# Altium PCB version-01.pcbdoc
Units mm, origin at the board's own origin, x right, y up, seen from the top; angles counter-clockwise.
Board outline 112.01 x 82.68 mm, 2 copper layers (Top Layer, Bottom Layer); 60 components, 62 nets, 258 pads, 85 vias.
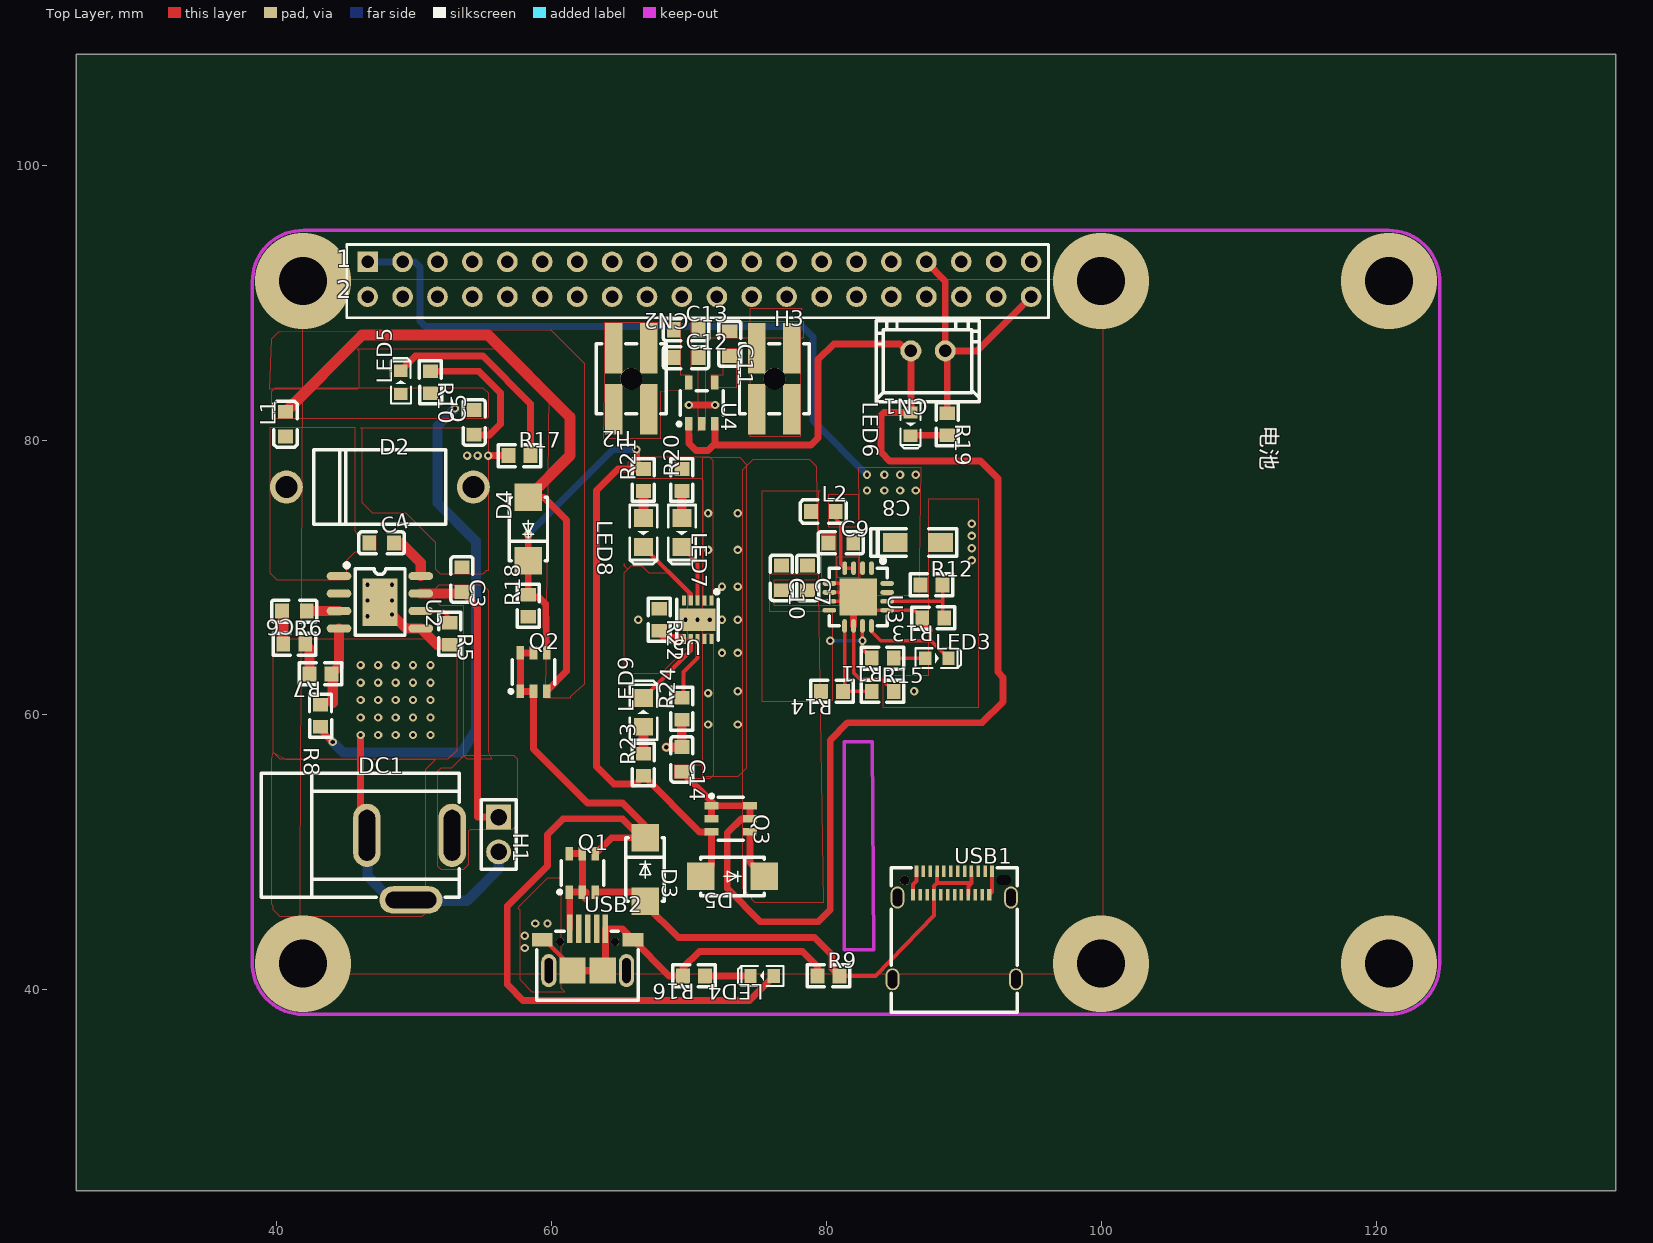
[diagram p0: Top Layer view]
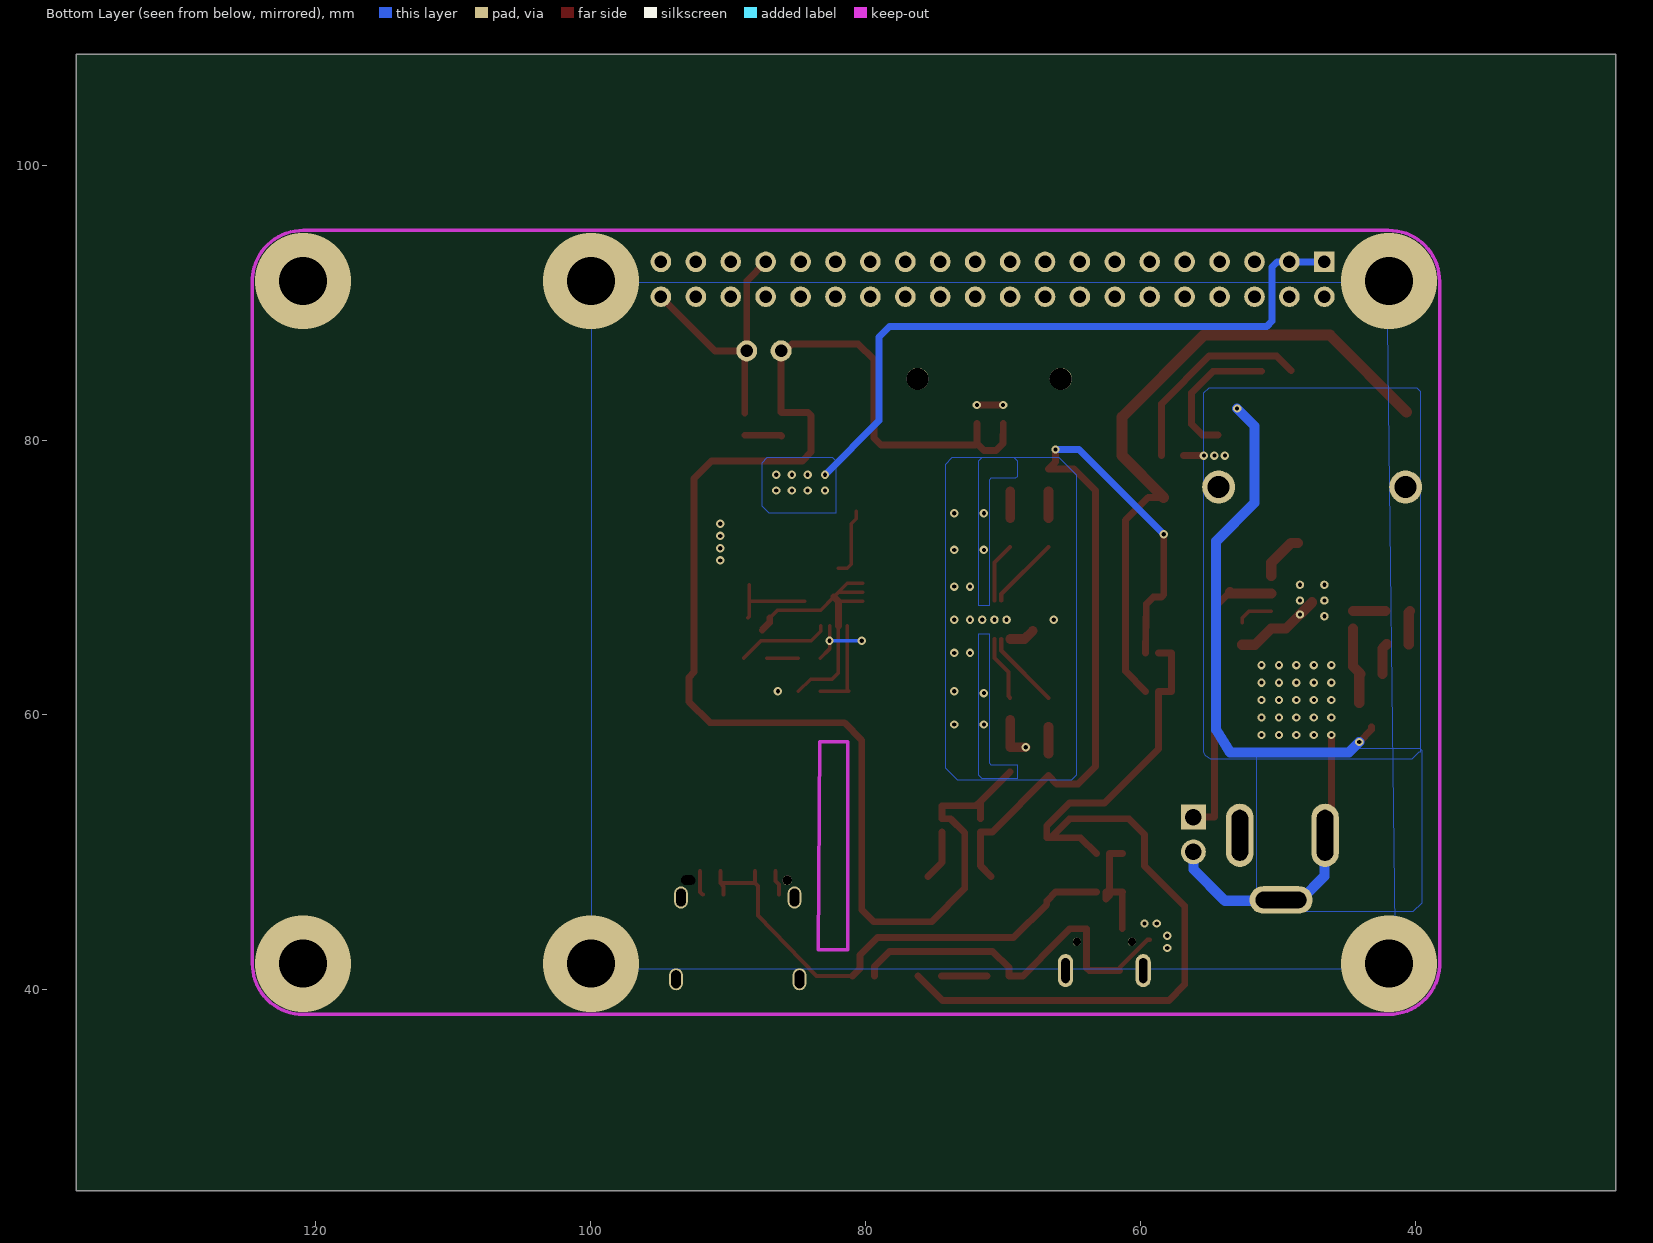
[diagram p1: Bottom Layer view, seen from below]

## Layer stack, top to bottom
Top Layer: signal copper (thickness not stored)
Dielectric: dielectric 0.32, FR-4, Dk 4.8
Bottom Layer: signal copper (thickness not stored)

## Board outline
137.414,25.4 25.4,25.4 25.4,108.077 137.414,108.077

## Components (designator, comment, footprint, x,y, rotation, side; value= is the part's Value field where it differs from the comment)
C3 "10u" C0603 53.467,69.85 r270 top
C4 "100n" C0603 47.625,72.517 r0 top
C5 "22u" C0603 54.356,81.28 r90 top
C6 "150pf" C0603 41.275,67.564 r180 top
C7 "0.1u" C0603 78.613,69.977 r270 top
C8 "100u" CASE-A_3216 86.741,72.517 r180 top
C9 "2.2u" C0603 81.026,72.517 r0 top
C10 "10u" C0603 76.708,69.977 r270 top
C11 "10n" C0603 72.949,87.008 r270 top
C12 "0.1u" C0603 69.774,85.992 r0 top
C13 "10u" C0603 69.774,88.024 r0 top
C14 "10u" C0603 69.469,56.769 r270 top
CN1 "XH-2A red RHOS" CONN-TH_2P-P2.50_XH-2A 87.376,86.487 r180 top
CN2 "Raspberry Pi 2" HDR2X20-REVERSED 70.739,91.694 r180 top
D2 "1N5822_C478728" DO-201AD_BD5.3-L8.4-P12.50-D1.4-RD 47.498,76.581 r0 top
D3 "SS34_C8678" DO-214AC_L4.3-W2.7-LS5.3-RD 66.802,48.768 r270 top
D4 "SS34_C8678" DO-214AC_L4.3-W2.7-LS5.3-RD 58.293,73.533 r90 top
D5 "SS34_C8678" DO-214AC_L4.3-W2.7-LS5.3-RD 73.152,48.26 r180 top
DC1 "DC-005-25A" DC-IN-TH_DC005 49.657,48.895 r0 top
H1 "Z-211-0211-0021-001" HDR-TH_2P-P2.54-V 56.134,51.308 r270 top
H2 "15912040" HDR-SMD_4P-P2.54-V-M-R2-C2-S2.54_15912040 65.786,84.455 r180 top
H3 "15912040" HDR-SMD_4P-P2.54-V-M-R2-C2-S2.54_15912040 76.2,84.455 r0 top
L1 "4.7u" L0603 40.64,81.153 r90 top
L2 "6.8u" L0603 79.756,74.803 r0 top
LED3 "LED-0603_R" LED0603_RED 88.011,64.135 r0 top
LED4 "LED-0603_G" LED0603_GREEN 75.311,41.021 r180 top
LED5 "LED-0603_B" LED0603_BLUE 49.022,84.201 r90 top
LED6 "LED-0603_R" LED0603_RED 86.106,81.153 r270 top
LED7 "0805" LED0805_RED 69.469,73.279 r270 top
LED8 "0805" LED0805_GREEN 66.675,73.279 r270 top
LED9 "0805" LED0805_BLUE 66.675,60.198 r90 top
Q1 "3443" SOT-23-6_L2.9-W1.6-P0.95-LS2.8-BL 62.23,48.514 r0 top
Q2 "3443" SOT-23-6_L2.9-W1.6-P0.95-LS2.8-BL 58.674,63.119 r0 top
Q3 "3443" SOT-23-6_L2.9-W1.6-P0.95-LS2.8-BL 73.025,52.451 r270 top
R5 "100k" R0603 52.578,65.913 r270 top
R6 "100k" R0603 41.275,65.151 r0 top
R7 "40.2k" R0603 43.18,62.992 r180 top
R8 "221k" R0603 43.18,59.944 r270 top
R9 "10k" R0603 80.137,41.021 r0 top
R10 "10k" R0603 51.181,84.201 r270 top
R11 "2k" R0603 84.074,64.135 r180 top
R12 "2M" R0603 87.63,69.469 r0 top
R13 "240K" R0603 87.757,67.056 r180 top
R14 "2.1M" R0603 80.391,61.722 r180 top
R15 "340K" R0603 84.074,61.722 r0 top
R16 "1k" R0603 70.358,41.021 r180 top
R17 "1k" R0603 57.658,78.867 r0 top
R18 "10k" R0603 58.293,67.945 r90 top
R19 "910" R0603 88.773,81.153 r270 top
R20 "1k" R0603 69.469,77.089 r90 top
R21 "1k" R0603 66.675,77.089 r90 top
R22 "2k" R0603 67.818,66.929 r270 top
R23 "1k" R0603 66.675,56.388 r90 top
R24 "10k" R0603 69.469,60.452 r90 top
U2 "MP1584EN-LF-Z" SOIC-8_L5.0-W4.0-P1.27-LS6.0-BL-EP 47.498,68.199 r270 top
U3 "TPS61090RSAR" QFN-16_L4.0-W4.0-P0.65-TL-EP2.7 82.296,68.58 r270 top
U4 "LP2992AIM5X-3.3/NOPB" SOT-23-5_L3.0-W1.7-P0.95-LS2.8-BR 70.917,82.69 r270 top
U5 "MCP73833T-AMI/MF" DFN-10_L3.0-W3.0-P0.50-BL-EP 70.612,66.929 r180 top
USB1 "12401832E402A" USB-C-TH_12401832E402A 89.281,44.704 r0 top
USB2 "MICRO5.9MMUSB" MICRO-USB-SMD_5P-P0.65-H-F_MICRO5.9MMUSB 62.611,42.926 r0 top

## Footprints (in the part's own frame and the unit in brackets; to place one, negate y for a bottom-side part, rotate by r counter-clockwise, add the part's x,y. Pads: shape width x height; smd on the part's side, far side on the other; paste and mask are expansions set on the pad)
C0603 [mm]
  rect 1x1.1 smd: 1(-0.9,0) 2(0.9,0)
  silkscreen extent -1.65,-0.8 1.65,0.8
CASE-A_3216 [mil]
  rect 71.5x53.5 smd: 1(69,-1) 2(-60,-1)
  silkscreen extent -107,-40 139,39
CONN-TH_2P-P2.50_XH-2A [mil]
  round 60 hole 36: 1(-49.22,0) 2(49.21,0)
  silkscreen extent -147,-87 149,146
DC-IN-TH_DC005 [mm]
  oval 2x4.6 hole 1.2 slot 3.7 at 90 deg: 1(3.1,2.35) 2(-3.1,2.35)
  oval 4.6x2 hole 1.2 slot 3.7 at 0 deg: 3(0.1,-2.35)
  silkscreen extent -10.8,-2.15 3.6,6.85
DFN-10_L3.0-W3.0-P0.50-BL-EP [mm]
  rect 0.3x0.7 smd: 1(-1.001,-1.4) 2(-0.5,-1.4) 3(0,-1.4) 4(0.5,-1.4) 5(1.001,-1.4) 6(1.001,1.4) 7(0.5,1.4) 8(0,1.4) 9(-0.5,1.4) 10(-1.001,1.4)
  rect 2.6x1.65 smd: 11(0,0)
  silkscreen extent -1.52,-2.16 1.5,1.5
DO-201AD_BD5.3-L8.4-P12.50-D1.4-RD [mm]
  round 2.4 hole 1.6: 1(-6.8,0) 2(6.8,0)
  silkscreen extent -4.8,-2.7 4.8,2.7
DO-214AC_L4.3-W2.7-LS5.3-RD [mm]
  rect 2x2 smd: 1(-2.3,0) 2(2.3,0)
  silkscreen extent -2.3,-1.4 2.3,1.4
HDR2X20-REVERSED [mil]
  rect 59x59 hole 36: 1(950,-50)
  round 59 hole 36: 2(950,50) 3(850,-50) 4(850,50) 5(750,-50) 6(750,50) 7(650,-50) 8(650,50) 9(550,-50) 10(550,50) 11(450,-50) 12(450,50) 13(350,-50) 14(350,50) 15(250,-50) 16(250,50) 17(150,-50) 18(150,50) 19(50,-50) 20(50,50) 21(-50,-50) 22(-50,50) 23(-150,-50) 24(-150,50) 25(-250,-50) 26(-250,50) 27(-350,-50) 28(-350,50) 29(-450,-50) 30(-450,50) 31(-550,-50) 32(-550,50) 33(-650,-50) 34(-650,50) 35(-750,-50) 36(-750,50) 37(-850,-50) 38(-850,50) 39(-950,-50) 40(-950,50)
  silkscreen extent -1000,-100 1010,110
HDR-SMD_4P-P2.54-V-M-R2-C2-S2.54_15912040 [mm]
  rect 1.27x3.68 smd: 1(-1.27,-2.22) 2(-1.27,2.22) 3(1.27,-2.22) 4(1.27,2.22)
  round 1.6 hole 1.6 unplated: ""(0,0)
  silkscreen extent -2.54,-2.54 2.54,2.54
HDR-TH_2P-P2.54-V [mm]
  rect 1.8x1.8 hole 1.2: 1(-1.27,0)
  round 1.8 hole 1.2: 2(1.27,0)
  silkscreen extent -2.54,-1.27 2.54,1.27
L0603 [mm]
  rect 1x1.1 smd: 1(-0.9,0) 2(0.9,0)
  silkscreen extent -1.68,-0.85 1.68,0.85
LED0603_BLUE [mm]
  rect 0.9x1 smd: 1(-0.85,0) 2(0.85,0)
  silkscreen extent -1.54,-0.73 1.75,0.73
LED0603_GREEN [mm]
  rect 0.9x1 smd: 1(-0.85,0) 2(0.85,0)
  silkscreen extent -1.54,-0.73 1.75,0.73
LED0603_RED [mm]
  rect 0.9x1 smd: 1(-0.85,0) 2(0.85,0)
  silkscreen extent -1.54,-0.73 1.75,0.73
LED0805_BLUE [mm]
  rect 1.3x1.4 smd: 1(-1.05,0) 2(1.05,0)
  silkscreen extent -2,-1 2.3,1
LED0805_GREEN [mm]
  rect 1.3x1.4 smd: 1(-1.05,0) 2(1.05,0)
  silkscreen extent -2,-1 2.3,1
LED0805_RED [mm]
  rect 1.3x1.4 smd: 1(-1.05,0) 2(1.05,0)
  silkscreen extent -2,-1 2.3,1
MICRO-USB-SMD_5P-P0.65-H-F_MICRO5.9MMUSB [mm]
  rect 0.4x2.1 smd: 1(-1.3,1.525) 2(-0.65,1.525) 3(0,1.525) 4(0.65,1.525) 5(1.3,1.525)
  rect 1.5x1 smd: 6(-3.3,0.725) 6(3.3,0.725)
  oval 1.1x2.399 hole 0.6 slot 1.8 at 90 deg: 6(-2.825,-1.525) 6(2.825,-1.525)
  rect 1.9x1.9 smd: 6(-1.1,-1.525) 6(1.1,-1.525)
  round 0.6 hole 0.6 unplated: ""(-2,0.575) ""(2,0.575)
  silkscreen extent -3.7,-3.67 3.7,1.32
QFN-16_L4.0-W4.0-P0.65-TL-EP2.7 [mm]
  oval 0.996x0.35 smd: 1(-2.1,0.965) 2(-2.1,0.315) 3(-2.1,-0.335) 4(-2.1,-0.986) 9(2.1,-0.991) 10(2.1,-0.34) 11(2.1,0.31) 12(2.1,0.96)
  oval 0.35x0.996 smd: 5(-0.991,-2.1) 6(-0.34,-2.1) 7(0.31,-2.1) 8(0.96,-2.1) 13(0.96,2.1) 14(0.31,2.1) 15(-0.34,2.1) 16(-0.991,2.1)
  rect 2.7x2.7 smd: 17(0,0)
  silkscreen extent -2.79,-2.1 2.1,2.1
R0603 [mm]
  rect 1x1.1 smd: 1(-0.8,0) 2(0.8,0)
  silkscreen extent -1.55,-0.8 1.55,0.81
SOIC-8_L5.0-W4.0-P1.27-LS6.0-BL-EP [mm]
  oval 0.6x1.798 smd: 1(-1.905,-2.972) 2(-0.635,-2.972) 3(0.635,-2.972) 4(1.905,-2.972) 5(1.905,2.972) 6(0.635,2.972) 7(-0.635,2.972) 8(-1.905,2.972)
  rect 3.45x2.56 smd: 9(0,0)
  silkscreen extent -2.84,-2.56 2.39,1.83
SOT-23-5_L3.0-W1.7-P0.95-LS2.8-BR [mm]
  rect 1x0.55 smd: 1(1.5,-0.95) 2(1.5,0) 3(1.5,0.95) 4(-1.5,0.95) 5(-1.5,-0.95)
  silkscreen extent -0.9,-1.78 1.65,1.55
SOT-23-6_L2.9-W1.6-P0.95-LS2.8-BL [mm]
  rect 0.55x1 smd: 1(-0.95,-1.4) 2(0,-1.4) 3(0.95,-1.4) 4(0.95,1.4) 5(0,1.4) 6(-0.95,1.4)
  silkscreen extent -1.78,-1.52 1.55,0.9
USB-C-TH_12401832E402A [mm]
  oval 1x1.599 hole 0.7 slot 1.3 at 90 deg: 0(-4.49,-3.93) 0(-4.13,2.02) 0(4.13,2.02) 0(4.49,-3.93)
  rect 0.3x0.85 smd: A1(-2.75,3.93) A12(2.75,3.93) B1(2.55,2.23) B12(-3,2.23)
  rect 0.25x0.85 smd: A2(-2.25,3.93) A3(-1.75,3.93) A4(-1.25,3.93) A5(-0.75,3.93) A6(-0.25,3.93) A7(0.25,3.93) A8(0.75,3.93) A9(1.25,3.93) A10(1.75,3.93) A11(2.25,3.93) B2(2.025,2.23) B3(1.525,2.23) B4(1.025,2.23) B5(0.525,2.23) B6(0.025,2.23) B7(-0.475,2.23) B8(-0.975,2.23) B9(-1.475,2.23) B10(-1.975,2.23) B11(-2.475,2.23)
  round 0.7 hole 0.7 unplated: ""(-3.6,3.27)
  Multi-Layer board cut-out: 3.07,3.28 3.115,3.452 3.238,3.579 3.409,3.63 3.409,3.63 3.409,3.63 3.41,3.63 3.41,3.63 3.41,3.63 3.41,3.63 3.41,3.63 3.41,3.63 3.41,3.63 3.79,3.63 3.79,3.63 3.94,3.596 4.06,3.5 4.126,3.362 4.126,3.208 4.06,3.07 3.94,2.974 3.79,2.94 3.79,2.94 3.43,2.93 3.293,2.954 3.176,3.029 3.098,3.144 3.07,3.28 3.07,3.28 3.07,3.28
  silkscreen extent -4.6,-6.32 4.6,4.18

## Free pads (board coordinates)
  round 0.61 hole 0.305: ""(46.609,67.183) ""(46.609,68.326) ""(46.609,69.469) ""(48.387,67.31) ""(48.387,68.326) ""(48.387,69.469) ""(69.723,66.929) ""(70.612,66.929) ""(71.501,66.929)

## Via types
v1: diameter 0.61, hole 0.305, Top Layer to Bottom Layer, 79 vias
v2: diameter 7, hole 3.5, Top Layer to Bottom Layer, 6 vias

## Nets (pads, with @x,y where several pads share a name; then routed paths per layer and width w, separated by ;. In a path a pad name is that pad's centre, name@x,y a point inside that pad or via, vN(x,y) a via of type N, cw(c..) or ccw(c..) an arc to the next point about the centre after c; other vN are vias at no path point)
3.3V: CN2.2 CN2.18
4: CN2.7
5: CN2.9
5V_BOOST: C8.1 C9.2 CN2.1 CN2.3 R12.1 U3.1 U3.15 U3.16 | length 48.6
  Bottom Layer w0.5: CN2.1 CN2.3 50.038,92.964 50.419,92.583 50.419,88.646 50.8,88.265 78.232,88.265 78.994,87.503 78.994,81.407 v1(82.931,77.47)
  other v1: 82.931,76.327 84.201,76.327 85.344,76.327 86.487,76.327 84.201,77.47 85.344,77.47 86.487,77.47
5V_BUCK: C5.2 D4.2 L1.2 LED5.1 Q2.3 R8.2 R10.2 | length 87.3
  Top Layer w0.5: R8.2 43.18,58.928 v1(44.069,58.039) ; D4.2 59.422,75.833 61.087,74.168 61.087,63.182 Q2.3
  Top Layer w0.8: L1.2 46.217,87.63 51.689,87.63 55.372,87.63 61.341,81.661 61.341,78.881 D4.2
  Bottom Layer w0.74: v1(44.069,58.039) 44.831,57.277 53.467,57.277 54.483,58.928 54.483,72.644 51.689,75.438 51.689,81.026 v1(52.959,82.296)
6: CN2.11
8: CN2.15
9: CN2.17
11: CN2.21
13: CN2.25
16: CN2.31
18: CN2.35
19: CN2.37
DC1_1: C3.2 DC1.1 H1.1 U2.7 | length 21.5
  Top Layer w0.5: C3.2 54.61,67.808 54.61,52.578 H1.1
  Top Layer w0.74: U2.7 53.467,68.834 C3.2
FB: R12.2 R13.1 U3.14 | length 6.5
  Top Layer w0.254: U3.14 88.35,68.27 88.43,68.189 ; R12.2 88.43,67.183 R13.1
GND: C3.1 C5.1 C7.2 C8.2 C9.1 C10.2 C11.1 C12.2 C13.2 C14.1 CN1.1 CN2.5 CN2.10 CN2.13 CN2.19 CN2.26 CN2.29 CN2.33 CN2.40 D2.2 DC1.2 DC1.3 H1.2 H3.1 H3.2 H3.3 H3.4 R5.2 R6.2 R7.2 R9.1 R10.1 R13.2 R15.2 R16.2 R17.1 R18.1 R19.1 R22.1 R24.1 U2.5 U3.5 U3.6 U3.7 U3.10 U3.13 U3.17 U4.2 U5.5 USB1.A1 USB1.A12 USB1.B1 USB1.B12 USB2.5 USB2.6@59.311,43.651 USB2.6@61.511,41.401 USB2.6@63.711,41.401 USB2.6@65.911,43.651 | length 121.6
  Top Layer w0.254: U3.7 81.986,68.27 U3.17 ; U3.6 81.956,68.92 U3.17 ; U3.5 81.306,69.571 U3.17 ; U3.10 81.956,63.078 82.423,62.611 83.985,62.611 R15.2 ; R13.2 86.393,67.62 U3.13 83.256,67.62 U3.17
  Top Layer w0.3: USB2.6@59.312,43.65 59.474,43.65 61.511,41.613 USB2.6@61.511,41.401 ; USB1.B12 86.281,47.673 86.531,47.923 USB1.A1 ; USB1.B1 92.031,47.134 USB1.A12
  Top Layer w0.5: v1(46.101,58.547) 46.101,51.701 DC1.2 ; R10.1 54.699,85.001 56.261,83.439 56.261,81.153 55.488,80.38 C5.1 ; v1(55.372,78.867) R17.1 ; USB2.6@61.511,41.401 63.711,41.401 63.911,41.601 USB2.5 65.111,44.451 65.911,43.651 68.541,41.021 R16.2 69.558,41.618 70.739,42.799 78.232,42.799 79.337,41.694 R9.1 ; v1(69.977,82.55) v1(71.882,82.55) ; U3.10 81.956,68.24 U3.17 ; R13.2 86.957,66.713 87.503,66.167 ; CN2.33 88.626,91.587 CN1.1 ; R19.1 88.773,86.34 CN1.1 ; CN2.40 90.932,86.487 CN1.1
  Top Layer w0.7: v1(68.326,57.658) C14.1 R24.1
  Top Layer w0.74: R6.2 42.38,64.846 R7.2 ; 47.498,68.199 49.403,66.294 U2.5 51.651,65.113 R5.2
  Bottom Layer w0.74: DC1.2 46.609,51.193 46.609,48.26 48.324,46.545 DC1.3 49.82,46.482 53.848,46.482 56.134,48.768 H1.2
  other v1: 58.039,43.053 58.039,43.942 58.801,44.831 59.69,44.831 47.371,58.547 48.641,58.547 49.911,58.547 51.181,58.547 73.533,59.309 46.101,59.817 47.371,59.817 48.641,59.817 49.911,59.817 51.181,59.817 46.101,61.087 47.371,61.087 48.641,61.087 49.911,61.087 51.181,61.087 73.533,61.722 86.36,61.722 46.101,62.357 46.101,62.357 47.371,62.357 47.371,62.357 48.641,62.357 48.641,62.357 49.911,62.357 49.911,62.357 51.181,62.357 51.181,62.357 46.101,63.627 46.101,63.627 47.371,63.627 47.371,63.627 48.641,63.627 48.641,63.627 49.911,63.627 49.911,63.627 51.181,63.627 51.181,63.627 72.39,64.516 73.533,64.516 66.294,66.929 72.39,66.929 73.533,66.929 72.39,69.342 73.533,69.342 90.551,71.247 73.533,72.009 90.551,72.136 90.551,73.025 90.551,73.914 73.533,74.676 53.848,78.867 54.61,78.867
H4_8: CN2.8
H4_12: CN2.12
H4_14: CN2.14
H4_16: CN2.16
H4_22: CN2.22
H4_24: CN2.24
H4_28: CN2.28
H4_30: CN2.30
H4_32: CN2.32
H4_34: CN2.34
H4_36: CN2.36
H4_38: CN2.38
LED3_1: LED3.1 R11.1 | length 2.3
  Top Layer w0.254: R11.1 LED3.1
LED4_2: LED4.2 R16.1 | length 3.3
  Top Layer w0.5: R16.1 LED4.2
LED5_2: LED5.2 R17.2 | length 15.1
  Top Layer w0.5: LED5.2 50.077,86.106 54.991,86.106 58.458,82.639 R17.2
LED6_2: LED6.2 R19.2 | length 2.7
  Top Layer w0.5: LED6.2 86.156,80.353 R19.2
LED7_1: LED7.1 R20.1 | length 2
  Top Layer w0.7: LED7.1 R20.1
LED8_1: LED8.1 R21.1 | length 2
  Top Layer w0.7: LED8.1 R21.1
LED9_1: LED9.1 R23.2 | length 2
  Top Layer w0.7: R23.2 LED9.1
Q1_4: D3.1 LED4.1 Q1.4 Q2.1 Q2.2 Q2.5 Q2.6 | length 65.2
  Top Layer w0.5: Q2.5 Q2.6 Q2.1 Q2.2 58.674,57.531 62.611,53.594 65.151,53.594 66.802,51.943 D3.1 ; Q1.4 64.334,51.068 D3.1@66.802,51.068 ; LED4.1 74.383,39.243 57.912,39.243 56.769,40.386 56.769,46.101 59.69,49.022 59.69,51.308 60.833,52.451 65.151,52.451 66.534,51.068 D3.1@66.802,51.068
Q2_4: D4.1 D5.2 Q2.4 Q3.3 R18.2 R20.2 R21.2 R23.1 U5.1 U5.2 | length 60.1
  Top Layer w0.5: v1(58.293,73.152) D4.1 R18.2 58.458,68.58 59.055,68.58 59.563,68.072 Q2.4 ; v1(66.167,79.311) 66.167,78.397 R21.2 64.808,77.889 63.246,76.327 63.246,68.326 63.246,56.261 64.516,54.991 65.405,54.991 66.078,54.991 R23.1 70.762,51.501 Q3.3 71.625,49.033 D5.2
  Bottom Layer w0.5: v1(58.293,73.152) 64.453,79.311 v1(66.167,79.311)
  other v1: 71.374,72.009 71.374,74.676
R6_1: C6.2 R6.1 | length 2.5
  Top Layer w0.74: C6.2 40.475,67.464 R6.1
S$4197: 
S$4336: 
S$4342: 
S$4346: 
S$4352: 
U2_1: C4.1 D2.1 L1.1 U2.1
U2_3: C6.1 U2.3 | length 2.4
  Top Layer w0.74: C6.1 U2.3
U2_4: R7.1 R8.1 U2.4 | length 5.7
  Top Layer w0.74: 44.069,60.871 44.069,62.903 R7.1 44.526,63.538 U2.4
U2_6: R5.1 U2.6 | length 2.7
  Top Layer w0.254: U2.6 52.07,67.564 52.578,67.056 R5.1
U2_8: C4.2 U2.8 | length 3.5
  Top Layer w0.74: C4.2 49.022,72.517 50.47,71.069 U2.8
U3_3: L2.2 U3.3 U3.4 | length 5
  Top Layer w0.254: L2.2 80.656,74.284 81.026,73.914 81.026,70.965 U3.4 U3.3
U3_9: R14.1 R15.1 U3.9 | length 6.9
  Top Layer w0.254: U3.9 81.306,61.837 R14.1 R15.1
U3_12: LED3.2 U3.12 | length 6.8
  Top Layer w0.254: U3.12 83.256,66.096 83.947,65.405 87.591,65.405 LED3.2
U4_4: C11.2 U4.4
U4_5: C12.1 C13.1 H2.1 H2.2 H2.3 H2.4 U4.5
U5_3: LED7.2 U5.3 | length 4.4
  Top Layer w0.3: LED7.2 70.612,71.086 U5.3
U5_4: LED8.2 U5.4 | length 5.3
  Top Layer w0.3: LED8.2 70.112,68.792 U5.4
U5_6: R22.2 U5.6 | length 1.9
  Top Layer w0.7: R22.2 68.418,65.529 69.457,65.529
U5_7: LED9.2 U5.7 | length 5.7
  Top Layer w0.3: LED9.2 70.112,64.685 U5.7
U5_8: R24.2 U5.8 | length 4.8
  Top Layer w0.3: R24.2 69.596,61.379 69.596,63.119 70.612,64.135 U5.8
V_LI: C14.2 CN1.2 LED6.1 Q3.1 Q3.2 Q3.5 Q3.6 U4.1 U4.3 U5.9 U5.10 | length 110.8
  Top Layer w0.5: C14.2 71.625,53.713 ; U4.1 69.977,79.756 70.485,79.248 71.374,79.248 71.867,79.741 ; Q3.2 71.625,53.713 ; Q3.1 71.625,53.713 ; U4.3 71.867,79.741 ; LED6.1 86.126,82.023 CN1.2 85.852,86.487 85.344,86.995 80.518,86.995 79.375,85.852 79.375,80.137 78.867,79.629 71.979,79.629 71.867,79.741 ; LED6.1 84.163,82.004 83.947,81.788 83.947,79.121 84.582,78.486 91.186,78.486 92.456,77.216 92.456,63.119 92.837,62.738 92.837,60.96 91.313,59.436 81.534,59.436 80.264,58.166 80.264,45.847 79.375,44.958 75.184,44.958 72.771,47.371 72.771,51.435 73.787,52.451 Q3.5 Q3.6 71.937,53.401 71.625,53.713
  other v1: 71.374,59.309 71.374,61.595
V_SELECT: C7.1 C10.1 D5.1 L2.1 Q3.4 R11.2 R14.2 U3.8 U3.11 | length 8.6
  Top Layer w0.254: U3.11 v1(82.606,65.405) 82.606,64.803 R11.2
  Top Layer w0.5: Q3.4 74.425,49.287 D5.1
  Bottom Layer w0.254: v1(80.264,65.405) v1(82.606,65.405)
VBUS_A: Q1.1 Q1.2 Q1.5 Q1.6 USB2.1 | length 8.8
  Top Layer w0.5: Q1.6 Q1.5 62.23,46.86 62.484,46.606 62.484,47.114 Q1.1 61.311,47.083 USB2.1
VBUS_C: D3.2 Q1.3 R9.2 USB1.A4 USB1.A9 USB1.B4 USB1.B9 | length 37.3
  Top Layer w0.3: R9.2 83.566,41.021 87.805,45.418 USB1.B9 ; USB1.B9 87.806,47.547 88.031,47.772 ; USB1.A4 88.031,47.772 ; USB1.B4 90.307,47.508 90.531,47.772 ; USB1.A9 90.531,47.772 ; 88.031,47.772 90.531,47.772
  Top Layer w0.5: Q1.3 66.156,47.114 D3.2@66.802,46.468 ; D3.2@66.802,46.469 66.802,46.228 69.215,43.815 79.121,43.815 80.391,42.545 80.391,41.567 R9.2
pads on no net: CN2.4 CN2.6 CN2.20 CN2.23 CN2.27 CN2.39 H2. H3. U2.2 U2.9 U3.2 U5.11 USB1. USB1.0 USB1.A2 USB1.A3 USB1.A5 USB1.A6 USB1.A7 USB1.A8 USB1.A10 USB1.A11 USB1.B2 USB1.B3 USB1.B5 USB1.B6 USB1.B7 USB1.B8 USB1.B10 USB1.B11 USB2. USB2.2 USB2.3 USB2.4 USB2.6@59.786,41.401 USB2.6@65.436,41.401
copper on no net:
  other v2: 41.91,41.91 99.949,41.91 120.904,41.91 41.91,91.567 99.949,91.567 120.904,91.567

## Polygon pours and split planes (outlines as drawn)
GND on Bottom Layer (solid): 39.751,57.277 40.259,56.769 54.864,56.769 55.245,57.023 55.372,57.277 55.372,83.439 54.991,83.82 39.878,83.82 39.624,83.566 39.624,57.277
GND on Bottom Layer (solid): 51.562,55.245 51.562,46.482 50.8,45.72 50.292,45.72 40.132,45.72 39.497,46.355 39.497,46.863 39.497,57.404 39.624,57.531 51.562,57.531
Q2_4 on Bottom Layer (solid): 71.755,67.945 71.755,78.486 71.501,78.74 69.215,78.74 68.961,78.486 68.961,78.359 68.961,77.343 69.088,77.216 69.215,77.216 70.739,77.216 70.866,77.216 70.993,77.089 70.993,76.962 70.993,67.945
V_LI on Bottom Layer (solid): 71.755,65.913 70.993,65.913 70.993,56.515 70.866,56.388 68.961,56.388 68.961,55.372 71.501,55.372 71.755,55.626 71.755,56.896
GND on Bottom Layer (solid): 74.168,78.232 73.66,78.74 65.913,78.74 64.643,77.47 64.643,55.753 64.643,55.626 65.024,55.245 73.279,55.245 74.168,56.134
5V_BOOST on Top Layer (solid): 86.741,68.707 86.868,77.978 85.09,77.978 82.296,77.978 82.423,68.707
GND on Top Layer (solid): 84.074,60.579 91.059,60.579 91.059,75.692 87.376,75.692 87.376,62.865 84.074,62.865
U3_3 on Top Layer (solid): 82.296,71.501 82.296,69.977 80.772,69.977 80.772,71.501
U3_3 on Top Layer (solid): 80.137,73.66 80.137,76.073 82.296,76.073 82.296,73.66
GND on Top Layer (solid): 80.899,67.945 76.2,67.945 76.2,69.85 79.629,69.85 79.629,73.152 80.645,73.152 80.645,69.723 80.772,69.723
V_SELECT on Top Layer (solid): 80.391,67.564 80.391,61.087 80.264,60.96 75.311,60.96 75.311,76.327 79.502,76.327 79.375,76.2 79.375,70.358 79.248,70.231 75.819,70.231 75.819,67.564 76.327,67.564
U4_4 on Top Layer (solid): 73.457,83.833 73.457,86.627 72.441,86.627 72.441,84.722 71.552,84.722 71.552,83.833
U4_5 on Top Layer (solid): 70.028,83.706 70.028,84.722 69.393,84.722 69.393,88.532 63.805,88.532 63.805,83.579 63.754,80.137 67.945,80.137 67.945,83.566
GND on Top Layer (solid): 70.663,80.658 70.663,85.103 70.155,85.103 70.155,88.659 78.283,88.659 78.283,87.389 71.171,87.389 71.171,81.166
GND on Top Layer (solid): 74.422,80.264 78.105,80.264 78.105,89.408 78.232,89.535 74.422,89.535
5V_BUCK on Top Layer (solid): 39.624,81.534 39.624,83.439 39.624,83.566 39.878,83.82 54.864,83.82 54.991,83.82 55.372,83.439 55.372,81.661 55.245,81.534 51.689,81.534
GND on Top Layer (solid): 55.372,80.899 55.372,70.485 55.245,70.485 54.991,70.231 51.943,70.231 51.562,70.612 51.562,72.517 49.403,74.676 46.99,74.676 46.228,75.438 46.228,80.772 46.101,80.899
U2_1 on Top Layer (solid): 39.497,80.899 39.497,70.485 39.497,70.358 40.005,69.85 45.085,69.85 45.085,71.247 45.212,71.374 45.593,71.755 45.72,71.882 47.117,71.882 47.244,72.009 47.244,73.025 46.228,73.025 46.101,73.152 45.847,73.152 45.72,73.406 45.72,80.899
DC1_1 on Top Layer (solid): 51.562,69.215 51.816,69.469 54.864,69.469 54.991,69.469 55.372,69.088 55.372,57.277 55.626,56.769 54.864,56.769 53.975,56.769 53.848,56.769 53.594,57.023 53.594,67.945 51.943,67.945 51.435,68.453
GND on Top Layer (solid): 53.086,65.532 53.086,57.531 53.086,57.404 52.451,56.769 40.386,56.769 40.259,56.769 39.751,57.277 39.751,64.262 41.021,65.532
DC1_1 on Top Layer (solid): 53.594,57.023 52.959,56.388 52.705,56.134 51.943,56.134 51.689,55.88 51.689,49.022 51.943,48.768 52.197,48.768 53.594,48.768 53.975,49.149 53.975,51.562 54.102,51.689 57.15,51.689 57.531,52.07 57.531,56.769 57.277,57.023
GND on Top Layer (solid): 51.562,56.769 50.927,56.134 50.8,56.007 50.8,45.593 50.546,45.339 40.259,45.339 39.751,45.847 39.751,46.101 39.624,46.228 39.624,56.769 39.751,57.277 40.64,56.769
Q2_4 on Top Layer (solid): 71.755,68.072 71.755,78.486 71.501,78.74 71.374,78.74 65.913,78.74 65.532,78.359 65.532,77.47 65.786,77.216 65.913,77.216 70.866,77.216 70.993,77.089 70.993,67.945
GND on Top Layer (solid): 65.278,70.993 65.278,70.866 65.532,70.612 65.786,70.866 66.548,70.866 67.056,70.358 68.707,70.358 68.707,70.231 69.85,69.088 69.85,64.897 69.723,64.77 67.945,62.992 65.278,62.992 65.278,70.358 65.532,70.612 65.278,70.866 65.278,70.993
V_LI on Top Layer (solid): 71.755,65.913 71.755,55.626 71.501,55.372 68.961,55.372 68.961,56.388 70.866,56.388 70.993,56.515 70.993,65.913
GND on Top Layer (solid): 70.993,78.74 73.66,78.74 74.168,78.232 74.168,56.134 73.533,55.499 70.993,55.499
GND on Top Layer (solid): 59.69,48.133 57.531,45.974 57.658,45.847 57.658,40.767 58.547,39.878 59.055,39.878 60.96,39.878 60.706,40.132 60.706,48.133
5V_BUCK on Top Layer (solid): 39.624,87.376 40.132,87.884 40.259,87.884 59.944,88.011 62.357,85.598 62.357,62.23 61.341,61.341 61.341,61.214 60.833,61.214 59.69,61.214 59.563,61.214 59.817,83.566 59.055,84.455 58.166,85.09 56.896,86.614 45.847,86.614 45.974,86.487 45.974,83.82 45.847,83.693 39.497,83.693
V_SELECT on Top Layer (solid): 79.756,46.355 74.803,46.355 74.549,46.609 74.549,46.736 73.914,47.371 73.914,77.851 74.676,78.613 78.74,78.613 79.248,78.105
5V_BOOST on Bottom Layer (solid): 82.169,74.676 86.995,74.676 87.503,75.184 87.503,75.565 87.503,75.692 87.503,78.359 87.122,78.74 82.423,78.74 82.169,78.486 82.169,78.105
GND on Top Layer (solid): 41.91,91.694 100.076,91.694 100.076,41.783 99.441,41.148 41.656,41.148
GND on Bottom Layer (solid): 42.037,91.313 42.164,91.44 99.949,91.44 99.949,41.529 41.402,41.529

## Keep-outs
Keep-Out Layer:
  lines w0.254 net S$4197: 38.227,41.746 ccw(c41.91,41.91) 41.885,38.223 ; 38.227,91.506 cw(c41.91,91.567) 41.96,95.25 ; 120.871,95.251 cw(c120.904,91.567) 124.587,91.657 ; 120.874,38.222 ccw(c120.904,41.91) 124.592,41.945

## Silkscreen, mask and mechanical layers (free items; w line width, h text height)
Top Overlay:
  text "电池" at 111.252,81.026 h2.03 r269
Document:
  lines w0.003: 81.382,66.713 81.432,66.764

## Text inside footprints (layer, text, board x,y; h text height)
CN2: Top Overlay "2" at 44.323,90.297 h1.27; Top Overlay "1" at 44.323,92.583 h1.27